# Altium PCB Eingangsstufe.PcbDoc
Units mm, origin at the board's own origin, x right, y up, seen from the top; angles counter-clockwise.
Board outline 150 x 75 mm, 2 copper layers (Top Layer, Bottom Layer); 115 components, 77 nets, 322 pads, 9 vias.
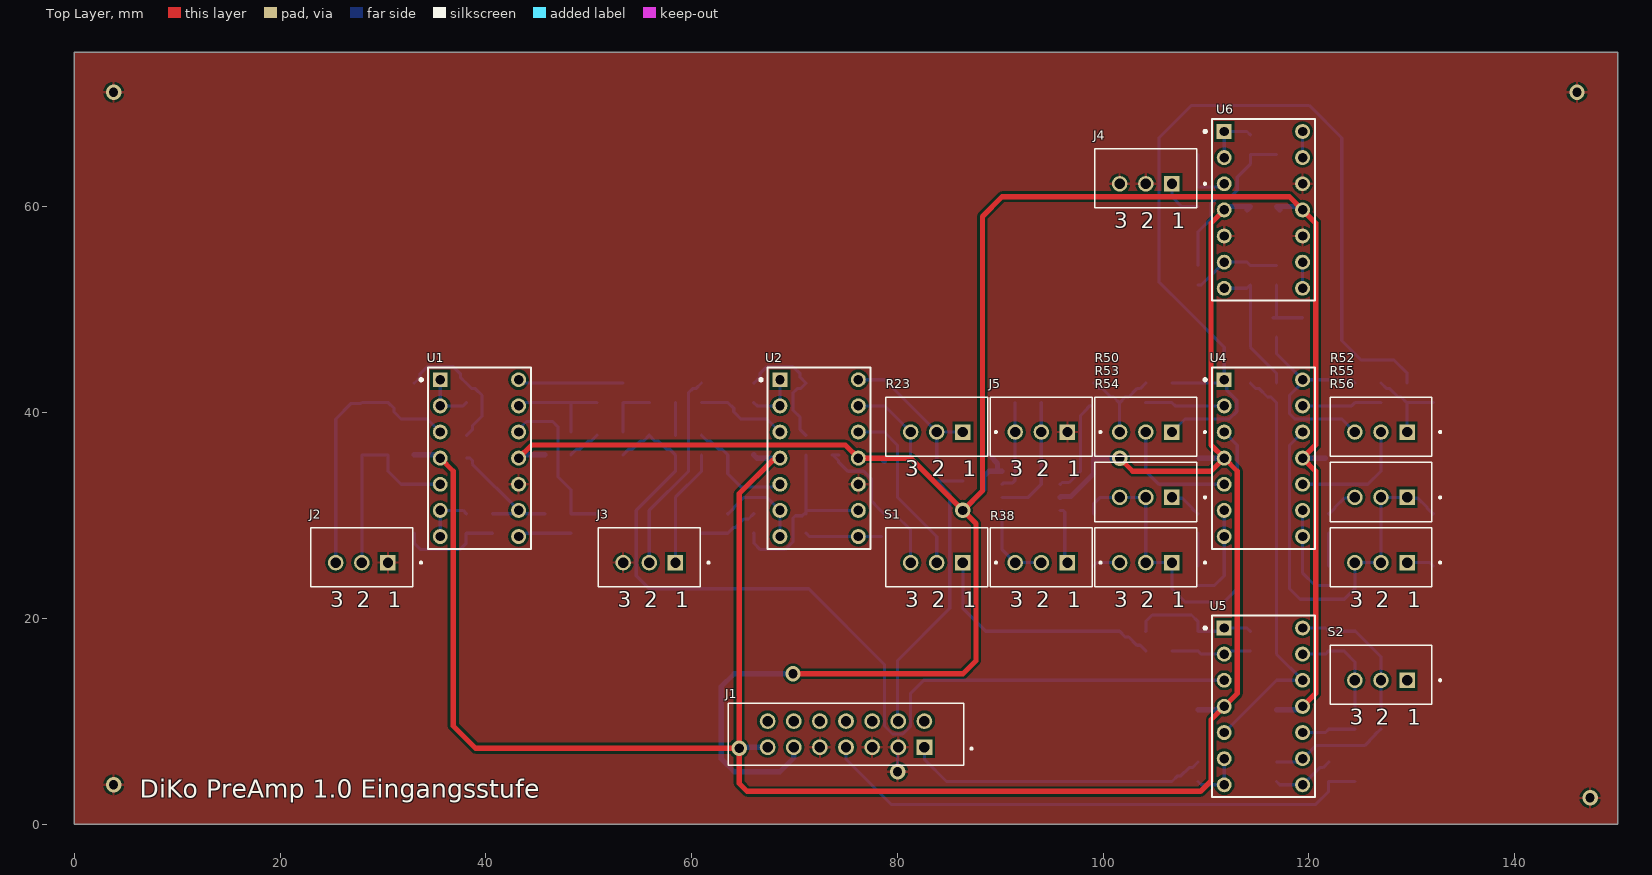
[diagram p0: Top Layer view]
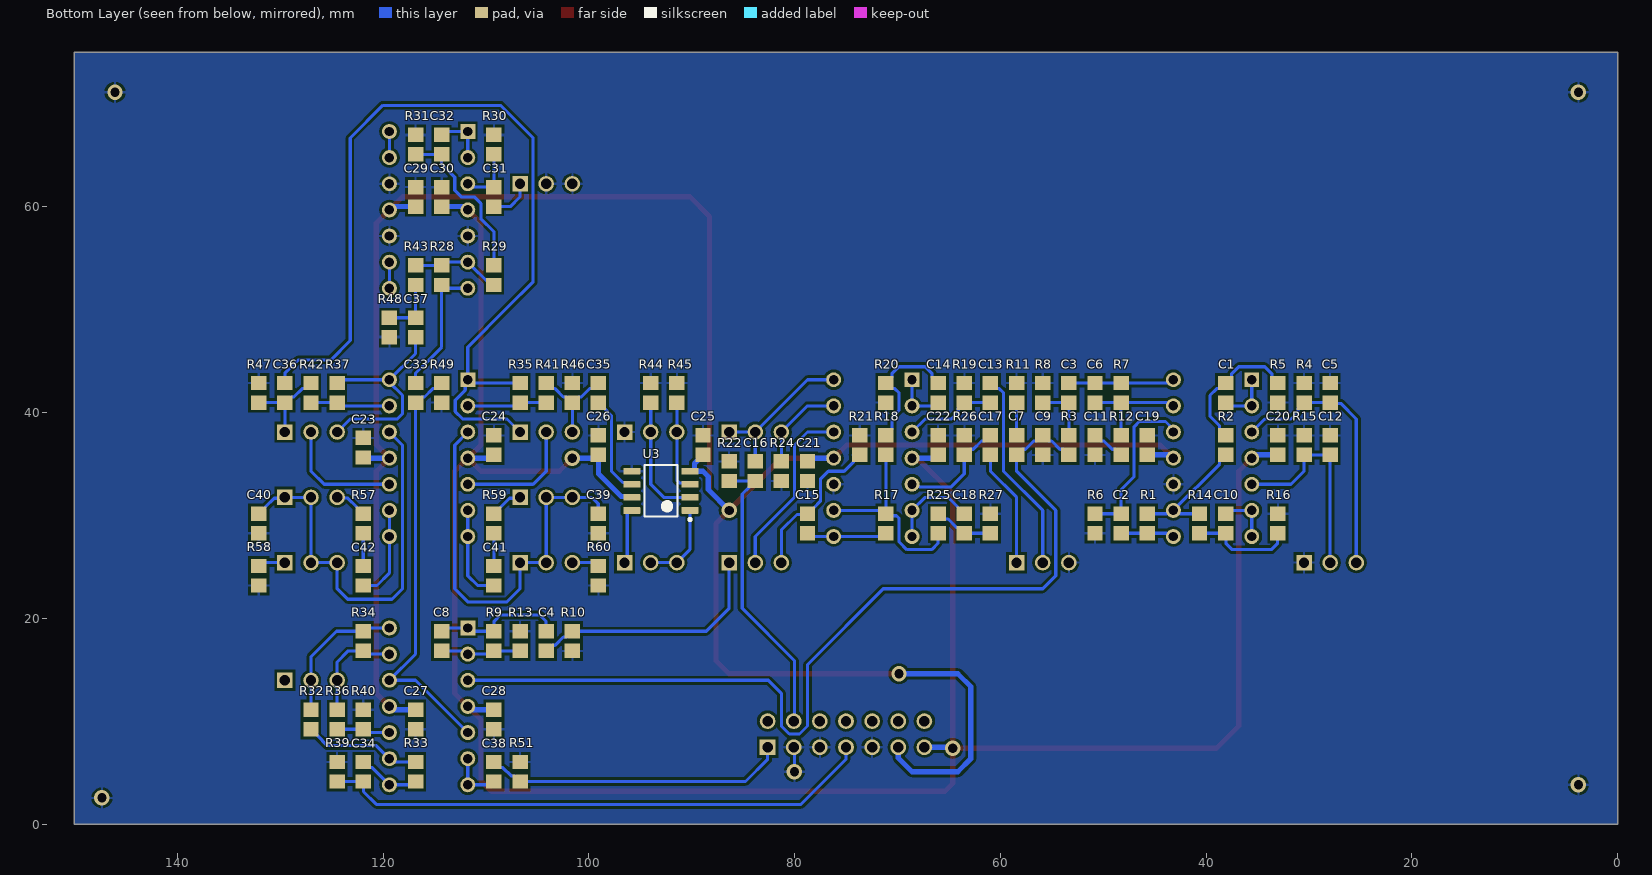
[diagram p1: Bottom Layer view, seen from below]
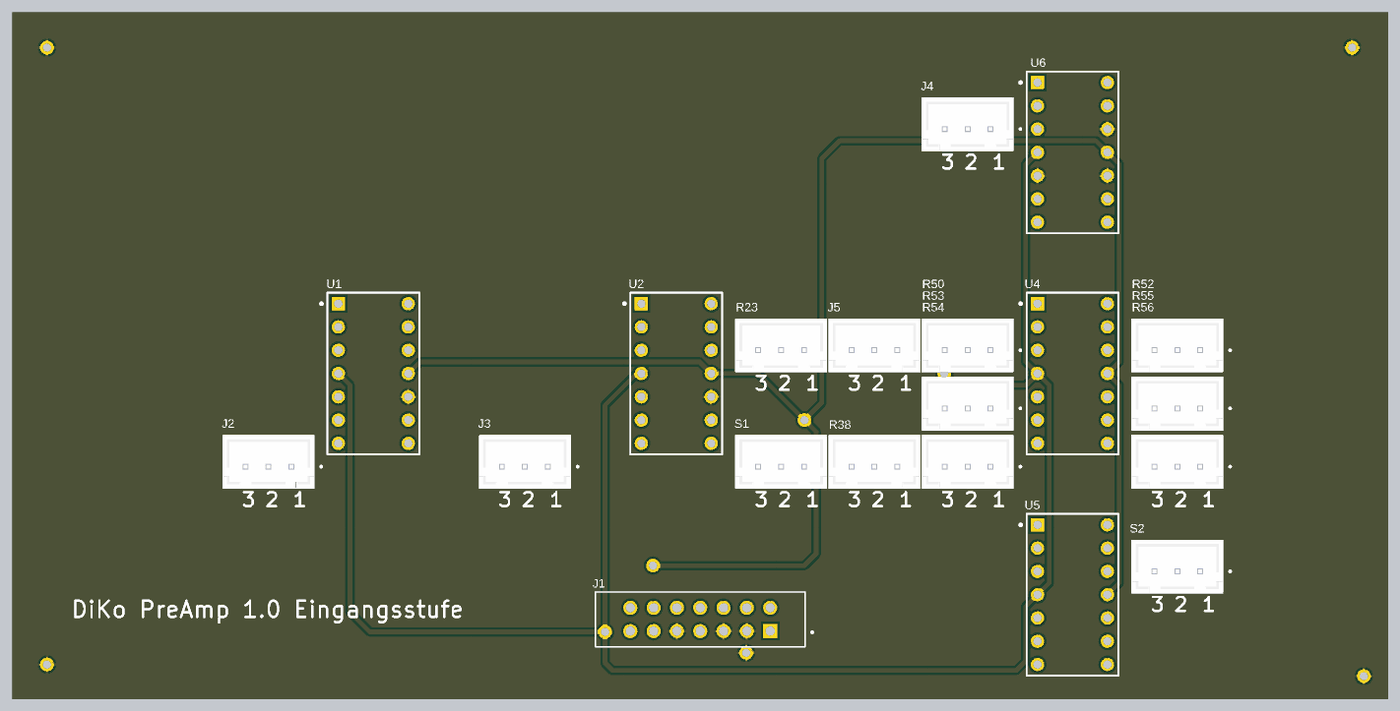
[diagram p2: 3D render of the assembled board from above, using the file's embedded part models]
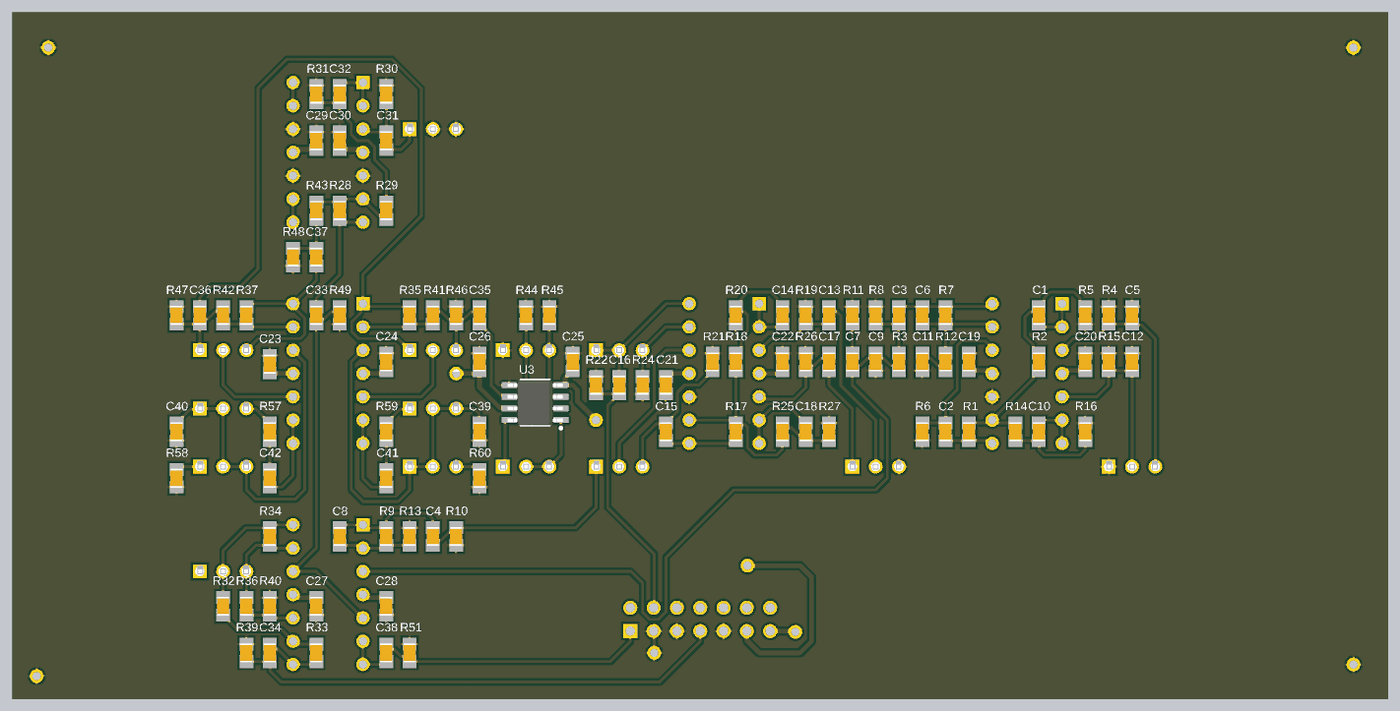
[diagram p3: 3D render of the assembled board from below, using the file's embedded part models]

## Layer stack, top to bottom
Top Solder: solder mask 0.0102, Solder Resist, Dk 3.5
Top Layer: signal copper 0.0356
Dielectric 1: dielectric 0.32, FR-4, Dk 4.8
Bottom Layer: signal copper 0.0356
Bottom Solder: solder mask 0.0102, Solder Resist, Dk 3.5

## Board outline
0,0 150,0 150,75 0,75

## Design rules (kind name [scope] priority, off if disabled: settings)
Clearance [All] p1: gap=0.254 ignorepadtopadclearanceinfootprint=FALSE except(0: Arc-Hole Track-Hole SMDPad-Hole THPad-Hole Via-Hole Fill-Hole Poly-Hole Region-Hole Text-Hole)
HoleSize [All] p1: absolutevalues=TRUE maxlimit=5.08 minlimit=0.152 maxpercent=80.000 minpercent=20.000
HoleToHoleClearance [All] p1: gap=0.203 allowstackedmicrovias=TRUE
MinimumSolderMaskSliver [All] p1: minsoldermaskwidth=0.102
PolygonConnect [All] p1: connectstyle=Relief reliefconductorwidth=0.254 reliefentries=4 polygonreliefangle="90 Angle" airgapwidth=0.254
RoutingVias [All] p1: holewidth=0.9 width=1.5 viastyle="Through Hole" minholewidth=0.711 minwidth=1.27 maxholewidth=0.914 maxwidth=1.524
SilkToSilkClearance [All] p1: silktosilkclearance=0.102
SilkToSolderMaskClearance [IsPad] p1: minsilkscreentomaskgap=0.152 clearancetoexposedcopper=TRUE
SolderMaskExpansion [All] p1: expansion=0.051 istentingtop=FALSE
Width +18V [InNet('+18V')] p1: maxlimit=0.508 minlimit=0.508 preferedwidth=0.508
Width -18V [InNet('-18V')] p2: maxlimit=0.508 minlimit=0.508 preferedwidth=0.508
Width +6V [InNet('+6V')] p3: maxlimit=0.508 minlimit=0.508 preferedwidth=0.508
Width +5V_DP [InNet('5V_DP')] p4: maxlimit=0.508 minlimit=0.381 preferedwidth=0.381
Width [All] p5: maxlimit=0.305 minlimit=0.254 preferedwidth=0.305
25 further rules are at their usual default settings.

## Components (designator, comment, footprint, x,y, rotation, side; value= is the part's Value field where it differs from the comment)
C1 "10u" 0805 38.1,41.91 r270 bottom
C2 "10u" 0805 48.26,29.21 r270 bottom
C3 "10u" 0805 53.34,41.91 r90 bottom
C4 "10u" 0805 104.14,17.78 r90 bottom
C5 "330p" 0805 27.94,41.91 r270 bottom
C6 "15p" 0805 50.8,41.91 r90 bottom
C7 "470n" 0805 58.42,36.83 r270 bottom
C8 "15p" 0805 114.3,17.78 r90 bottom
C9 "150n" 0805 55.88,36.83 r90 bottom
C10 "10u" 0805 38.1,29.21 r90 bottom
C11 "33u" 0805 50.8,36.83 r90 bottom
C12 "330p" 0805 27.94,36.83 r270 bottom
C13 "10u" 0805 60.96,41.91 r270 bottom
C14 "10u" 0805 66.04,41.91 r270 bottom
C15 "10u" 0805 78.74,29.21 r270 bottom
C16 "10u" 0805 83.82,34.29 r270 bottom
C17 "10u" 0805 60.96,36.83 r270 bottom
C18 "10u" 0805 63.5,29.21 r90 bottom
C19 "100n" 0805 45.72,36.83 r270 bottom
C20 "100n" 0805 33.02,36.83 r270 bottom
C21 "100n" 0805 78.74,34.29 r90 bottom
C22 "100n" 0805 66.04,36.83 r270 bottom
C23 "100n" 0805 121.92,36.576 r270 bottom
C24 "100n" 0805 109.22,36.83 r270 bottom
C25 "100n" 0805 88.9,36.83 r270 bottom
C26 "100n" 0805 99.06,36.83 r270 bottom
C27 "100n" 0805 116.84,10.16 r90 bottom
C28 "100n" 0805 109.22,10.16 r90 bottom
C29 "100n" 0805 116.84,60.96 r270 bottom
C30 "100n" 0805 114.3,60.96 r270 bottom
C31 "10u" 0805 109.22,60.96 r90 bottom
C32 "10u" 0805 114.3,66.04 r90 bottom
C33 "10u" 0805 116.84,41.91 r270 bottom
C34 "100n" 0805 121.92,5.08 r270 bottom
C35 "10u" 0805 99.06,41.91 r90 bottom
C36 "10u" 0805 129.54,41.91 r270 bottom
C37 "10u" 0805 116.84,48.26 r270 bottom
C38 "10u" 0805 109.22,5.08 r90 bottom
C39 "470p" 0805 99.06,29.21 r90 bottom
C40 "3n" 0805 132.08,29.21 r270 bottom
C41 "3n" 0805 109.22,24.13 r90 bottom
C42 "20n" 0805 121.92,24.13 r270 bottom
J1 "Connector x14" "Connector x14" 75,10 r0 top
J2 "Phono_In" "Connector x3" 27.94,25.4 r0 top
J3 "Line_In" "Connector x3" 55.88,25.4 r0 top
J4 "Effect_In" "Connector x3" 104.14,62.23 r0 top
J5 "XLR_In" "Connector x3" 93.98,38.1 r0 top
R1 "10k" 0805 45.72,29.21 r270 bottom
R2 "10k" 0805 38.1,36.83 r90 bottom
R3 "4k7" 0805 53.34,36.83 r90 bottom
R4 "47k" 0805 30.48,41.91 r270 bottom
R5 "220k" 0805 33.02,41.91 r270 bottom
R6 "220k" 0805 50.8,29.21 r270 bottom
R7 "22k" 0805 48.26,41.91 r90 bottom
R8 "220k" 0805 55.88,41.91 r270 bottom
R9 "22k" 0805 109.22,17.78 r90 bottom
R10 "220k" 0805 101.6,17.78 r90 bottom
R11 "680" 0805 58.42,41.91 r270 bottom
R12 "1k" 0805 48.26,36.83 r90 bottom
R13 "1k2" 0805 106.68,17.78 r270 bottom
R14 "10k" 0805 40.64,29.21 r270 bottom
R15 "47k" 0805 30.48,36.83 r270 bottom
R16 "220k" 0805 33.02,29.21 r90 bottom
R17 "10k" 0805 71.12,29.21 r270 bottom
R18 "10k" 0805 71.12,36.83 r90 bottom
R19 "220k" 0805 63.5,41.91 r270 bottom
R20 "220k" 0805 71.12,41.91 r270 bottom
R21 "220k" 0805 73.66,36.83 r270 bottom
R22 "220k" 0805 86.36,34.29 r270 bottom
R23 "47k lin" "Connector x3" 83.82,38.1 r0 top
R24 "220k" 0805 81.28,34.29 r90 bottom
R25 "10k" 0805 66.04,29.21 r90 bottom
R26 "220k" 0805 63.5,36.83 r270 bottom
R27 "220k" 0805 60.96,29.21 r90 bottom
R28 "10k" 0805 114.3,53.34 r270 bottom
R29 "10k" 0805 109.22,53.34 r90 bottom
R30 "220k" 0805 109.22,66.04 r270 bottom
R31 "220k" 0805 116.84,66.04 r90 bottom
R32 "10k" 0805 127,10.16 r270 bottom
R33 "10k" 0805 116.84,5.08 r270 bottom
R34 "10k" 0805 121.92,17.78 r90 bottom
R35 "22k" 0805 106.68,41.91 r90 bottom
R36 "5k" 0805 124.46,10.16 r270 bottom
R37 "22k" 0805 124.46,41.91 r90 bottom
R38 "10k lin" "Connector x3" 93.98,25.4 r0 top
R39 "220k" 0805 124.46,5.08 r270 bottom
R40 "5k" 0805 121.92,10.16 r270 bottom
R41 "22k" 0805 104.14,41.91 r270 bottom
R42 "22k" 0805 127,41.91 r270 bottom
R43 "10k" 0805 116.84,53.34 r270 bottom
R44 "47k" 0805 93.98,41.91 r270 bottom
R45 "47k" 0805 91.44,41.91 r270 bottom
R46 "220k" 0805 101.6,41.91 r270 bottom
R47 "220k" 0805 132.08,41.91 r270 bottom
R48 "220k" 0805 119.38,48.26 r270 bottom
R49 "220k" 0805 114.3,41.91 r90 bottom
R50 "47k lin" "Connector x3" 104.14,38.1 r0 top
R51 "220k" 0805 106.68,5.08 r270 bottom
R52 "47k lin" "Connector x3" 127,38.1 r0 top
R53 "220k log" "Connector x3" 104.14,31.75 r0 top
R54 "220k log" "Connector x3" 104.14,25.4 r0 top
R55 "220k log" "Connector x3" 127,31.75 r0 top
R56 "220k log" "Connector x3" 127,25.4 r0 top
R57 "6.8k" 0805 121.92,29.21 r270 bottom
R58 "6.8k" 0805 132.08,24.13 r270 bottom
R59 "6.8k" 0805 109.22,29.21 r90 bottom
R60 "6.8k" 0805 99.06,24.13 r90 bottom
S1 "Phono/Line Schalter" "Connector x3" 83.82,25.4 r0 top
S2 "Schalter Buchsenleiste" "Connector x3" 127,13.97 r0 top
U1 "OPA4134UA" "DIP14 IC Socket" 39.37,35.56 r90 top
U2 "OPA4134UA" "DIP14 IC Socket" 72.39,35.56 r90 top
U3 "INA128U" "INA 128" 92.995,32.385 r0 bottom
U4 "OPA4134UA" "DIP14 IC Socket" 115.57,35.56 r90 top
U5 "OPA4134UA" "DIP14 IC Socket" 115.57,11.43 r90 top
U6 "OPA4134UA" "DIP14 IC Socket" 115.57,59.69 r90 top

## Footprints (in the part's own frame and the unit in brackets; to place one, negate y for a bottom-side part, rotate by r counter-clockwise, add the part's x,y. Pads: shape width x height; smd on the part's side, far side on the other; paste and mask are expansions set on the pad)
0805 [mm] "0805"
  rect 1.4x1.5 smd: 1(-0.95,0) 2(0.95,0)
  body extent -1.05,-0.67 1.05,0.67, height 1.35
"Connector x3" [mm] "Connector x3"
  rect 1.508x1.508 / inner round 1.508 / far side rect 1.508x1.508 hole 1: 1(2.54,0)
  round 1.508 hole 1: 2(0,0) 3(-2.54,0)
  silkscreen extent -4.95,-2.35 5.85,3.4, body extent -4.95,-2.35 4.95,3.4, height 7
"Connector x14" [mm]
  rect 1.53x1.53 hole 1.02: 1(7.62,-2.54)
  round 1.53 hole 1.02: 2(7.62,0) 3(5.08,-2.54) 4(5.08,0) 5(2.54,-2.54) 6(2.54,0) 7(0,-2.54) 8(0,0) 9(-2.54,-2.54) 10(-2.54,0) 11(-5.08,-2.54) 12(-5.08,0) 13(-7.62,-2.54) 14(-7.62,0)
  silkscreen extent -11.43,-4.27 12.3,1.73
"DIP14 IC Socket" [mm] "Socket, 14-Leads, Body 17.653x10.0076mm, Pitch 2.54mm"
  rect 1.45x1.45 hole 0.911: 1(7.62,3.81)
  round 1.45 hole 0.911: 2(5.08,3.81) 3(2.54,3.81) 4(0,3.81) 5(-2.54,3.81) 6(-5.08,3.81) 7(-7.62,3.81) 8(-7.62,-3.81) 9(-5.08,-3.81) 10(-2.54,-3.81) 11(0,-3.81) 12(2.54,-3.81) 13(5.08,-3.81) 14(7.62,-3.81)
  silkscreen extent -8.83,-5 8.83,5.78, body extent -8.83,-5 8.83,5, height 5.36
"INA 128" [mm] "SOIC, 8-Leads, Body 5x4mm, Pitch 1.27mm, IPC Low Density"
  rrect15% 1.65x0.65 smd: 1(-2.825,1.905) 2(-2.825,0.635) 3(-2.825,-0.635) 4(-2.825,-1.905) 5(2.825,-1.905) 6(2.825,-0.635) 7(2.825,0.635) 8(2.825,1.905)
  silkscreen extent -2.95,-2.5 1.6,2.9, body extent -3,-2.45 3,2.45, height 1.63

## Part data
C1 C2 C3 C4 C5 C6 C7 C8 C9 C10 C11 C12 C13 C14 C15 C16 C17 C18 C19 C20 C21 C22 C23 C24 C25 C26 C27 C28 C29 C30 C31 C32 C33 C34 C35 C36 C37 C38 C39 C40 C41 C42: library part "0805 Kondensator", "0805 Kondensator"
J1: "14 Position Header Connector Through Hole", Package=None, Availability=Warning, Check_prices=https://www.snapeda.com/parts/SFH11-PBPC-D07-ST-BK/Sullins%20Connector%20Solutions/view-part/851415/?ref=eda, MF="Sullins Connector", MP=SFH11-PBPC-D07-ST-BK, Price=None, Purchase-URL=https://pricing.snapeda.com/search/part/SFH11-PBPC-D07-ST-BK/?ref=eda, SnapEDA_Link=https://www.snapeda.com/parts/SFH11-PBPC-D07-ST-BK/Sullins%20Connector%20Solutions/view-part/851415/?ref=snap, System=Connector
J2 J3 J4 J5: library part "Connector x3", "Connector Header Through Hole 3 position 0.100 (2.54mm)", Package=None, Check_prices=https://www.snapeda.com/parts/B3B-XH-A/JST+Sales+America+Inc./view-part/?ref=eda, MF="JST Sales", MP=B3B-XH-A, SnapEDA_Link=https://www.snapeda.com/parts/B3B-XH-A/JST+Sales+America+Inc./view-part/?ref=snap
R1 R2 R3 R4 R5 R6 R7 R8 R9 R10 R11 R12 R13 R14 R15 R16 R17 R18 R19 R20 R21 R22 R24 R25 R26 R27 R28 R29 R30 R31 R32 R33 R34 R35 R36 R37 R39 R40 R41 R42 R43 R44 R45 R46 R47 R48 R49 R51 R57 R58 R59 R60: library part "0805 Widerstand", "0805 Widerstand"
R23 R38 R50 R52 R53 R54 R55 R56: library part "Potentiometer Buchsenleiste", "Potentiometer"
S1: library part "Schalter Buchsenleiste", "Toggle Switch SPDT Through Hole", Package=None, Availability=Unavailable, MP=100SP1T1B4M2QE, Price=None
S2: "Toggle Switch SPDT Through Hole", Package=None, Availability=Unavailable, MP=100SP1T1B4M2QE, Price=None
U1 U2 U4 U5 U6: library part "SOIC OPA4134UA", "SoundPlus(TM) High Performance Audio Operational Amplifier, 5 to 36 V, -55 to 125 degC, 14-pin SOIC (D14), Green (RoHS & no Sb/Br)", Manufacturer="Texas Instruments", Code_JEDEC=MS-012, ComponentLink1Description="Manufacturer URL", ComponentLink1URL=http://www.ti.com/, ComponentLink2Description=Datasheet, ComponentLink2URL=http://www.ti.com/general/docs/lit/getliterature.tsp?genericPartNumber=OPA4134&fileType=pdf, ComponentLink3Description="Package Specification", ComponentLink3URL=http://www.ti.com/lit/ml/mpds177g/mpds177g.pdf, DatasheetVersion=SBOS058, Eco-Plan="Green (RoHS & no Sb/Br)", GBW(Typ)(MHz)=8, Iq per channel(Max)(mA)=5, Mounting Technology="Surface Mount", Number of Channels=4, PackageDescription="14-Pin Plastic Small Outline, Body 8.65 x 3.9 mm, Pitch 1.27 mm", PackageReference=D0014A, PackageVersion="4040047-5/M, 06/2011", PartNumber=OPA4134UA, SubFamily="Audio Operational Amplifier", Vmax(V)=36, Vmin(V)=5, Vn at Flatband(Typ)(nV/rtHz)=8
U3: library part "INA 128", "Precision, Low Power Instrumentation Amplifier, -40 to 85 degC, 8-pin SOIC (D8), Green (RoHS & no Sb/Br)", Input Bias Current (+/-)(Max)(nA)=5, Manufacturer="Texas Instruments", Quiescent Current (+/-)(Typ)(mA)=0.7, CMRR(Min)(dB)=120, Code_JEDEC=MS-012, ComponentLink1Description="Manufacturer URL", ComponentLink1URL=http://www.ti.com/, ComponentLink2Description=Datasheet, ComponentLink2URL=http://www.ti.com/general/docs/lit/getliterature.tsp?genericPartNumber=INA128&fileType=pdf, ComponentLink3Description="Package Specification", ComponentLink3URL=http://www.ti.com/litv/pdf/msoi002j, DatasheetVersion=SBOS051B, Eco-Plan="Green (RoHS & no Sb/Br)", Gain(V/V)="1 to 10000", Input Offset (+/-)(Max)(uV)=50, Input Offset Drift (+/-)(Max)(uV/Degrees Celsius)=0.5, Mounting Technology="Surface Mount", Noise at 1kHz(Typ)(nV/rt(Hz))=8, Non-Linearity (+/-)(Max)(%)=0.002, Number of Channels=1, PackageDescription="8-Pin Plastic Small Outline, Body 4.9 x 3.9 mm, Pitch 1.27 mm", PackageReference=D0008A, PackageVersion="4040047-3/M, 06/2011", PartNumber=INA128U, SubFamily="Dual Supply", Vs(Max)(V)=36, Vs(Min)(V)=4.5

## Via types
v1: diameter 1.5, hole 0.9, Top Layer to Bottom Layer, 9 vias

## Nets (pads, with @x,y where several pads share a name; then routed paths per layer and width w, separated by ;. In a path a pad name is that pad's centre, name@x,y a point inside that pad or via, vN(x,y) a via of type N, cw(c..) or ccw(c..) an arc to the next point about the centre after c; other vN are vias at no path point)
+18V: C20.2 C22.2 C24.2 C26.2 C28.2 C30.2 J1.13 U1.4 U2.4 U3.7 U4.4 U5.4 U6.4 | length 230
  Top Layer w0.508: U1.4 36.83,34.29 36.83,9.525 38.989,7.366 v1(64.631,7.366) ; U2.4 68.4,35.38 67.892,35.38 64.631,32.119 v1(64.631,7.366) ; v1(101.6,35.56) 102.87,34.29 110.49,34.29 U4.4 ; U6.4 110.466,58.396 110.466,36.854 U4.4 ; v1(64.631,7.366) 64.631,3.949 65.405,3.175 100.965,3.175 109.465,3.175 110.47,4.18 110.47,10.14 U5.4 113.03,12.7 113.03,34.29 U4.4
  Bottom Layer w0.508: C20.2 34.985,35.88 35.305,35.56 U1.4 ; v1@64.77,7.39 64.746,7.366 v1(64.631,7.366) 64.725,7.46 J1.13 ; C22.2 66.36,35.56 U2.4 ; U3.7 95.891,31.821 96.845,31.821 99.06,34.036 C26.2 99.38,35.56 v1(101.6,35.56) ; C28.2 111.185,11.11 111.505,11.43 U5.4 ; C24.2@109.322,35.56 U4.4 ; U6.4 112.08,60.01 C30.2 C30.2@113.98,59.69
-18V: C19.2 C21.2 C23.2 C25.2 C27.2 C29.2 J1.11 U1.11 U2.11 U3.4 U4.11 U5.11 U6.11 | length 237.6
  Top Layer w0.508: U1.11 44.45,36.83 74.93,36.83 U2.11 81.28,35.56 v1(86.36,30.48) ; v1(69.85,14.605) 86.36,14.605 87.63,15.875 87.63,29.21 v1(86.36,30.48) ; U5.11 120.65,12.7 120.65,34.29 U4.11 120.65,36.83 120.65,58.42 U6.11 118.11,60.96 90.17,60.96 88.265,59.055 88.265,32.385 v1(86.36,30.48)
  Bottom Layer w0.508: U1.11@42.672,35.56 43.435,35.56 43.755,35.88 C19.2 ; v1(69.85,14.605) 64.135,14.605 62.865,13.335 62.865,6.35 64.135,5.08 68.58,5.08 69.92,6.42 J1.11 ; U2.11 78.42,35.56 C21.2 ; v1(86.36,30.48) 88.392,32.512 88.392,33.782 88.9,34.29 U3.4@89.809,34.29 ; C25.2 88.95,35.88 89.396,35.434 89.396,35.384 89.738,35.042 89.738,34.361 U3.4@89.809,34.29 ; U3.4 U3.4@89.809,34.29 ; C27.2 118.805,11.11 119.125,11.43 U5.11 ; C29.2@117.16,59.69 C29.2 119.06,60.01 U6.11 ; U4.11 C23.2@121.6,35.56
A01: R50.2 U4.5 | length 12
  Bottom Layer w0.305: R50.2 104.14,34.29 105.41,33.02 U4.5
A02: C39.2 R53.2 R53.3 R54.1 R54.2 U4.3 | length 40.9
  Bottom Layer w0.305: C39.2 99.084,30.184 99.084,31.139 99.695,31.75 R53.2 R54.2 R54.1 106.68,22.86 107.95,21.59 111.76,21.59 113.03,22.86 113.03,36.83 U4.3
A03: R52.2 U4.10 | length 12
  Bottom Layer w0.305: U4.10 125.73,33.02 127,34.29 R52.2
A04: C40.1 R55.1 R55.2 R56.2 R56.3 U4.12 | length 40.2
  Bottom Layer w0.305: U4.12 118.11,36.83 118.11,22.86 119.126,21.844 123.444,21.844 124.46,22.86 R56.3 R56.2 R55.2 R55.1 129.623,31.667 130.573,31.667 131.482,30.758 131.482,30.708 132.03,30.16 C40.1
AUX_Mic: C34.2 J1.7 R39.2 | length 54
  Bottom Layer w0.305: J1.7@74.93,7.39 J1.7 75,6.28 79.375,1.905 120.65,1.905 121.896,3.151 121.896,4.106 C34.2 R39.2
Effect_In: C31.1 J4.1 | length 4.2
  Bottom Layer w0.305: J4.1 106.68,60.96 107.63,60.01 C31.1
Heiß: J5.3 R45.2 U3.3 | length 9
  Bottom Layer w0.305: U3.3 90.306,33.156 91.192,33.156 91.44,33.404 R45.2
Kalt: J5.2 R44.2 U3.2 | length 12.3
  Bottom Layer w0.305: U3.2 92.71,31.75 93.98,33.02 R44.2
"KST_1_1 / Line_Aux": C16.2 J1.4 R22.2 | length 28.6
  Bottom Layer w0.305: J1.4 80.01,10.07 80.01,15.875 85.09,20.955 85.09,32.07 84.418,32.742 84.418,32.792 83.87,33.34 C16.2 R22.2
KST_1_2: C38.2 J1.1 R51.2 | length 29.6
  Bottom Layer w0.305: J1.1@82.55,7.39 J1.1 82.62,6.28 84.77,4.13 R51.2 107.228,4.678 107.548,4.678 108.352,5.482 108.672,5.482 C38.2
L_Line: C17.2 J3.1 | length 11.5
  Bottom Layer w0.305: J3.1 58.42,31.75 60.96,34.29 C17.2
L_Phono: C12.2 J2.2 R15.2 U1.5 | length 20.2
  Bottom Layer w0.305: J2.2 C12.2 R15.2 30.48,34.29 31.75,33.02 U1.5
Line_Out: C15.1 R21.2 S1.3 | length 15.8
  Bottom Layer w0.305: R21.2@74.309,35.88 R21.2 73.71,35.88 74.258,35.332 74.258,35.216 75.184,34.29 76.708,34.29 77.494,33.504 77.494,31.36 78.142,30.712 78.142,30.708 78.69,30.16 C15.1 78.814,30.086 79.769,30.086 81.28,28.575 S1.3
Masse: C5.1 C9.1 C11.1 C12.1 C19.1 C20.1 C21.1 C22.1 C23.1 C24.1 C25.1 C26.1 C27.1 C28.1 C29.1 C30.1 C39.1 C40.2 J1.3 J1.5 J1.9 J2.1 J3.3 J4.2 J4.3 J5.1 R4.1 R5.2 R6.2 R8.1 R10.1 R11.1 R13.1 R15.1 R16.2 R19.1 R20.2 R21.1 R22.1 R24.1 R26.1 R27.2 R30.1 R31.2 R39.1 R40.1 R44.1 R45.1 R46.1 R47.1 R48.2 R49.1 R51.1 R58.2 R60.1 U1.10 U2.10 U3.5 U6.5 U6.10 U6.12 | length 2.5
  Bottom Layer w0.305: J1.5@77.47,7.39 J1.5 ; v1(80.01,5.08) 80.01,7.39 J1.3
  other v1: 147.32,2.54 3.81,3.81 3.81,71.12 146.05,71.12
NetC1_1: C1.1 R2.2 R5.1 | length 13.4
  Bottom Layer w0.305: R5.1 33.056,42.86 33.603,43.408 33.603,43.763 34.29,44.45 36.83,44.45 37.517,43.763 37.517,43.408 38.064,42.86 C1.1 38.648,42.312 38.968,42.312 39.624,41.656 39.624,39.624 38.683,38.683 38.683,38.328 38.136,37.78 R2.2
NetC1_2: C1.2 U1.1 U1.2 | length 5.2
  Bottom Layer w0.305: U1.1 U1.2 37.78,40.64 C1.2
NetC2_1: C2.1 R6.1 U1.12 | length 16.1
  Bottom Layer w0.305: U1.12 43.18,38.354 43.942,39.116 46.482,39.116 46.99,38.608 46.99,33.782 48.26,32.512 C2.1 R6.1
NetC2_2: C2.2 R1.2 U1.8 | length 5.2
  Bottom Layer w0.305: U1.8 43.49,27.94 43.81,28.26 C2.2
NetC3_1: C3.1 R3.2 R8.2 | length 5.4
  Bottom Layer w0.305: R3.2@53.34,38.1 C3.1 R8.2
NetC3_2: C3.2 C6.2 R7.2 U1.14 | length 10.3
  Bottom Layer w0.305: U1.14 43.49,43.18 43.81,42.86 C3.2
NetC4_2: C4.2 C8.2 R9.2 U5.1 | length 12.9
  Bottom Layer w0.305: C4.2 104.164,18.754 104.164,19.709 104.775,20.32 108.585,20.32 109.196,19.709 109.196,18.754 R9.2 111.44,18.73 U5.1 113.98,19.05 C8.2
NetC6_1: C6.1 R7.1 R12.2 U1.13 | length 10.6
  Bottom Layer w0.305: U1.13@43.235,40.591 43.441,40.591 43.81,40.96 R7.1 ; R12.2@48.26,38.1 R7.1 ; C6.1 R7.1
NetC7_1: C7.1 R11.2 | length 3.2
  Bottom Layer w0.305: C7.1 R11.2
NetC7_2: C7.2 C9.2 R3.1 U5.3 | length 91
  Bottom Layer w0.305: R3.1 53.888,36.428 54.208,36.428 55.012,37.232 55.332,37.232 C9.2 56.428,37.232 56.748,37.232 57.552,36.428 57.872,36.428 C7.2 58.42,34.29 54.61,30.48 54.61,24.13 55.88,22.86 71.374,22.86 78.74,15.494 78.74,9.525 79.517,8.748 80.503,8.748 81.28,9.525 81.28,12.7 82.55,13.97 U5.3
NetC8_1: C8.1 R9.1 R13.2 U5.2 | length 7.9
  Bottom Layer w0.305: R13.2 R9.1 109.54,16.51 112.07,16.51 112.39,16.83 C8.1
NetC10_1: C10.1 R14.2 R16.1 | length 10.1
  Bottom Layer w0.305: R16.1 33.044,28.236 33.044,27.281 33.655,26.67 37.465,26.67 38.076,27.281 38.076,28.236 C10.1 R14.2
NetC10_2: C10.2 U1.6 U1.7 | length 5.2
  Bottom Layer w0.305: U1.7 U1.6 37.78,30.48 C10.2
NetC11_2: C11.2 R12.1 | length 3.3
  Bottom Layer w0.305: R12.1 48.808,36.428 49.128,36.428 49.932,37.232 50.252,37.232 C11.2
NetC13_2: C13.2 R19.2 U2.3 | length 9
  Bottom Layer w0.305: C13.2 63.536,40.96 64.083,40.412 64.083,40.057 64.77,39.37 67.31,39.37 U2.3
NetC14_1: C14.1 R18.2 R20.1 | length 13.2
  Bottom Layer w0.305: C14.1 66.076,42.86 66.623,43.408 66.623,43.763 67.31,44.45 69.85,44.45 70.537,43.763 70.537,43.408 71.084,42.86 R20.1 70.572,42.312 70.252,42.312 69.85,41.91 69.85,40.205 70.537,39.519 70.537,38.328 71.084,37.78 R18.2
NetC14_2: C14.2 U2.1 U2.2 | length 5.2
  Bottom Layer w0.305: C14.2 66.36,40.64 U2.2 U2.1
NetC15_2: C15.2 R17.2 U2.8 | length 7.4
  Bottom Layer w0.305: R17.2 71.44,27.94 C15.2@78.42,27.94
NetC16_1: C16.1 R23.1 R23.2 U2.14 | length 15.1
  Bottom Layer w0.305: U2.14 78.74,43.18 R23.2 ; C16.1 R23.2 ; R23.1 R23.2
NetC17_1: C17.1 R26.2 U2.5 | length 10.9
  Bottom Layer w0.305: C17.1 61.508,37.232 61.828,37.232 62.632,36.428 62.952,36.428 R26.2 63.5,34.036 64.77,32.766 67.829,32.766 67.864,32.801 68.361,32.801 U2.5
NetC18_1: C18.1 R25.2 R27.1 | length 5.9
  Bottom Layer w0.305: R27.1 C18.1 64.048,28.808 64.243,28.808 65.074,29.639 65.519,29.639 R25.2
NetC18_2: C18.2 U2.6 U2.7 | length 8.8
  Bottom Layer w0.305: C18.2 63.55,30.16 64.098,30.708 64.098,30.758 65.09,31.75 67.31,31.75 U2.6 U2.7
NetC31_2: C31.2 R30.2 U6.3 | length 5.9
  Bottom Layer w0.305: R30.2 C31.2 111.44,61.91 U6.3
NetC32_1: C32.1 R29.2 R31.1 | length 16.2
  Bottom Layer w0.305: R29.2 109.22,57.564 110.49,58.834 110.49,60.325 111.125,60.96 112.395,60.96 113.03,61.595 113.03,62.865 114.3,64.135 C32.1 R31.1
NetC32_2: C32.2 U6.1 U6.2 | length 5.2
  Bottom Layer w0.305: U6.2 U6.1 113.98,67.31 C32.2
NetC33_1: C33.1 R28.2 U6.7 | length 13.3
  Bottom Layer w0.305: U6.7 113.98,52.07 R28.2 114.3,46.355 115.57,45.085 116.84,43.815 C33.1
NetC33_2: C33.2 R49.2 U5.5 U5.12 | length 41.1
  Bottom Layer w0.305: U5.5 116.84,13.97 U5.12 116.84,16.51 C33.2 116.292,41.508 115.972,41.508 115.168,42.312 114.848,42.312 R49.2
NetC34_1: C34.1 R33.2 U5.8 | length 6.1
  Bottom Layer w0.305: R33.2 117.16,3.81 U5.8 121.052,5.482 121.372,5.482 C34.1
NetC35_1: C35.1 U3.6 | length 9.3
  Bottom Layer w0.305: U3.6 95.993,33.193 96.693,33.193 97.79,34.29 97.79,39.69 98.462,40.362 98.462,40.412 98.707,40.657 C35.1@98.757,40.657
NetC35_2: C35.2 R41.1 R46.2 R50.3 | length 9.8
  Bottom Layer w0.305: C35.2 99.608,42.312 99.928,42.312 100.732,41.508 101.002,41.508 101.6,40.91 R46.2@101.6,40.64 ; R50.3 R46.2@101.6,40.64 ; R41.1 103.592,42.312 103.272,42.312 102.468,41.508 102.148,41.508 R46.2 R46.2@101.6,40.64
NetC36_1: C36.1 R35.2 R50.1 U4.1 | length 90.8
  Bottom Layer w0.305: R50.1 107.95,39.37 112.268,39.37 112.983,40.085 112.983,41.195 112.002,42.176 112.002,42.938 U4.1 ; R35.2 111.44,42.86 U4.1 ; C36.1 129.54,43.815 128.27,45.085 125.095,45.085 123.19,46.99 123.19,66.675 120.015,69.85 108.585,69.85 105.41,66.675 105.41,52.705 107.95,50.165 111.76,46.355 U4.1
NetC36_2: C36.2 R42.1 R47.2 R52.1 | length 9
  Bottom Layer w0.305: R42.1 127.548,42.312 127.868,42.312 128.672,41.508 128.942,41.508 129.54,40.91 C36.2@129.54,40.64 ; R52.1 C36.2@129.54,40.64 ; R47.2 C36.2 C36.2@129.54,40.64
NetC37_1: C37.1 R43.2 R48.1 | length 6
  Bottom Layer w0.305: C37.1@116.52,49.21 C37.1 ; R43.2 C37.1 ; R48.1 C37.1
NetC37_2: C37.2 R37.2 R52.3 U4.14 | length 21.3
  Bottom Layer w0.305: C37.2 116.84,45.72 U4.14 ; R52.3 123.19,39.37 118.618,39.37 118.11,39.878 118.11,41.656 119.38,42.926 U4.14 ; R37.2 124.14,43.18 U4.14
NetC38_1: C38.1 U5.6 U5.7 | length 5.2
  Bottom Layer w0.305: C38.1 109.54,3.81 U5.7 U5.6
NetC41_1: C41.1 U4.6 U4.7 | length 9.3
  Bottom Layer w0.305: C41.1 110.81,23.18 111.76,24.13 U4.6
NetC41_2: C41.2 R59.1 | length 3.2
  Bottom Layer w0.305: C41.2 R59.1
NetC42_1: C42.1 R57.2 | length 3.2
  Bottom Layer w0.305: C42.1 R57.2
NetC42_2: C42.2 U4.8 U4.9 | length 9.1
  Bottom Layer w0.305: U4.9 119.38,24.384 120.584,23.18 C42.2
NetR1_1: R1.1 R2.1 R14.1 U1.9 | length 12.7
  Bottom Layer w0.305: R2.1@38.1,35.56 38.456,35.56 38.683,35.332 38.683,34.977 U1.9 ; R14.1 42.55,30.16 42.87,30.48 U1.9 ; R1.1 43.81,30.16 43.49,30.48 U1.9
NetR17_1: R17.1 R18.1 R25.1 U2.9 | length 19.8
  Bottom Layer w0.305: R25.1 66.064,28.236 66.064,27.281 66.675,26.67 69.088,26.67 69.85,27.432 69.85,29.718 70.091,29.959 70.759,29.959 R17.1@71.026,30.226 ; R17.1 R17.1@71.12,30.48 ; R18.1 R17.1@71.12,30.48 ; U2.9 R17.1@71.12,30.48
NetR23_3: R23.3 R24.2 U2.13 | length 9
  Bottom Layer w0.305: U2.13 78.74,40.64 R23.3 R24.2
NetR28_1: R28.1 R29.1 R43.1 U6.6 | length 8.7
  Bottom Layer w0.305: R29.1 109.54,52.39 U6.6 113.98,54.61 R28.1 R43.1
NetR32_1: R32.1 R34.2 S2.2 U5.14 | length 13.9
  Bottom Layer w0.305: U5.14 121.6,19.05 R34.2 124.526,18.73 127,16.256 R32.1
NetR32_2: R32.2 R33.1 U5.9 | length 11.5
  Bottom Layer w0.305: R33.1 118.75,6.03 119.07,6.35 U5.9 120.65,7.62 125.41,7.62 126.402,8.612 126.402,8.662 126.95,9.21 R32.2
NetR34_1: R34.1 R36.1 S2.3 U5.13 | length 10.3
  Bottom Layer w0.305: U5.13 121.6,16.51 R34.1 123.378,16.83 124.46,15.748 R36.1
NetR35_1: R35.1 R41.2 U4.2 | length 7.8
  Bottom Layer w0.305: R41.2 R35.1 107,40.64 U4.2
NetR36_2: R36.2 R40.2 U5.10 | length 5.2
  Bottom Layer w0.305: U5.10 121.6,8.89 R40.2 R36.2
NetR37_1: R37.1 R42.2 U4.13 | length 7.8
  Bottom Layer w0.305: U4.13 124.14,40.64 R37.1 R42.2
NetR38_1: R38.1 U3.8 | length 5.5
  Bottom Layer w0.305: U3.8 96.093,30.48 96.266,30.307 96.266,25.654 R38.1
NetR38_2: R38.2 R38.3 U3.1 | length 8.1
  Bottom Layer w0.305: U3.1 90.17,26.67 R38.3 R38.2
NetR53_1: R53.1 R59.2 | length 3.2
  Bottom Layer w0.305: R53.1 106.763,31.667 107.713,31.667 108.622,30.758 108.622,30.708 109.17,30.16 R59.2
NetR54_3: R54.3 R60.2 | length 2.7
  Bottom Layer w0.305: R60.2 99.38,25.4 R54.3
NetR55_3: R55.3 R57.1 | length 3.2
  Bottom Layer w0.305: R57.1 121.97,30.16 122.518,30.708 122.518,30.758 123.433,31.673 124.383,31.673 R55.3
NetR56_1: R56.1 R58.1 | length 2.7
  Bottom Layer w0.305: R56.1 131.76,25.4 R58.1
NetS1_2: S1.2 U2.12 | length 17.3
  Bottom Layer w0.305: U2.12 78.74,38.1 80.01,36.83 80.01,31.75 83.82,27.94 S1.2
NetU6_8: U6.8 U6.9 | length 2.5
  Bottom Layer w0.305: U6.8 U6.9
NetU6_13: U6.13 U6.14 | length 2.5
  Bottom Layer w0.305: U6.13 U6.14
Phono_Out: C4.1 R10.2 S1.1 | length 23.9
  Bottom Layer w0.305: S1.1 86.36,20.955 88.585,18.73 R10.2 102.148,18.182 102.468,18.182 103.272,17.378 103.592,17.378 C4.1
R_Line: C13.1 J3.2 | length 19.8
  Bottom Layer w0.305: J3.2 55.88,30.48 59.69,34.29 59.69,41.91 60.092,42.312 60.412,42.312 C13.1
R_Phono: C5.2 J2.3 R4.2 U1.3 | length 26.2
  Bottom Layer w0.305: J2.3 25.4,39.37 26.911,40.881 27.861,40.881 C5.2 30.516,40.96 31.063,40.412 31.063,40.057 31.75,39.37 34.29,39.37 U1.3
pads on no net: J1.2 J1.6 J1.8 J1.10 J1.12 J1.14 S2.1

## Polygon pours and split planes (outlines as drawn)
Masse on Top Layer "Top Layer-No Net" (solid, pour order 2): 0,0 150,0 150,75 0,75
Masse on Bottom Layer "Top Layer-No Net1" (solid, pour order 3): 0,0 150,0 150,75 0,75

## Silkscreen, mask and mechanical layers (free items; w line width, h text height)
Top Overlay:
  text "DiKo PreAmp 1.0 Eingangsstufe" at 6.35,2.54 h1.78
Mechanical 1:
  lines w0.254: 0,0 0,75 150,75 ; 0,0 0,0 ; 0,0 150,0 150,75 ; 150,75 150,75

## Text inside footprints (layer, text, board x,y; h text height)
J2: Top Overlay "1" at 30.48,21.082 h1.52; Top Overlay "2" at 27.432,21.082 h1.52; Top Overlay "3" at 24.892,21.082 h1.52
J3: Top Overlay "1" at 58.42,21.082 h1.52; Top Overlay "2" at 55.372,21.082 h1.52; Top Overlay "3" at 52.832,21.082 h1.52
J4: Top Overlay "3" at 101.092,57.912 h1.52; Top Overlay "2" at 103.632,57.912 h1.52; Top Overlay "1" at 106.68,57.912 h1.52
J5: Top Overlay "1" at 96.52,33.782 h1.52; Top Overlay "2" at 93.472,33.782 h1.52; Top Overlay "3" at 90.932,33.782 h1.52
R23: Top Overlay "1" at 86.36,33.782 h1.52; Top Overlay "2" at 83.312,33.782 h1.52; Top Overlay "3" at 80.772,33.782 h1.52
R38: Top Overlay "1" at 96.52,21.082 h1.52; Top Overlay "2" at 93.472,21.082 h1.52; Top Overlay "3" at 90.932,21.082 h1.52
R54: Top Overlay "1" at 106.68,21.082 h1.52; Top Overlay "2" at 103.632,21.082 h1.52; Top Overlay "3" at 101.092,21.082 h1.52
R56: Top Overlay "1" at 129.54,21.082 h1.52; Top Overlay "2" at 126.492,21.082 h1.52; Top Overlay "3" at 123.952,21.082 h1.52
S1: Top Overlay "1" at 86.36,21.082 h1.52; Top Overlay "2" at 83.312,21.082 h1.52; Top Overlay "3" at 80.772,21.082 h1.52
S2: Top Overlay "1" at 129.54,9.652 h1.52; Top Overlay "2" at 126.492,9.652 h1.52; Top Overlay "3" at 123.952,9.652 h1.52